# Altium PCB Breakout.PcbDoc (part 2 of 2)
Units mil, origin at the board's own origin, x right, y up, seen from the top; angles counter-clockwise.
Board outline 5500 x 6885 mil, 2 copper layers (Top Layer, Bottom Layer); 119 components, 162 nets, 1494 pads, 75 vias.
Unrouted connection lines stored in the file: 1.
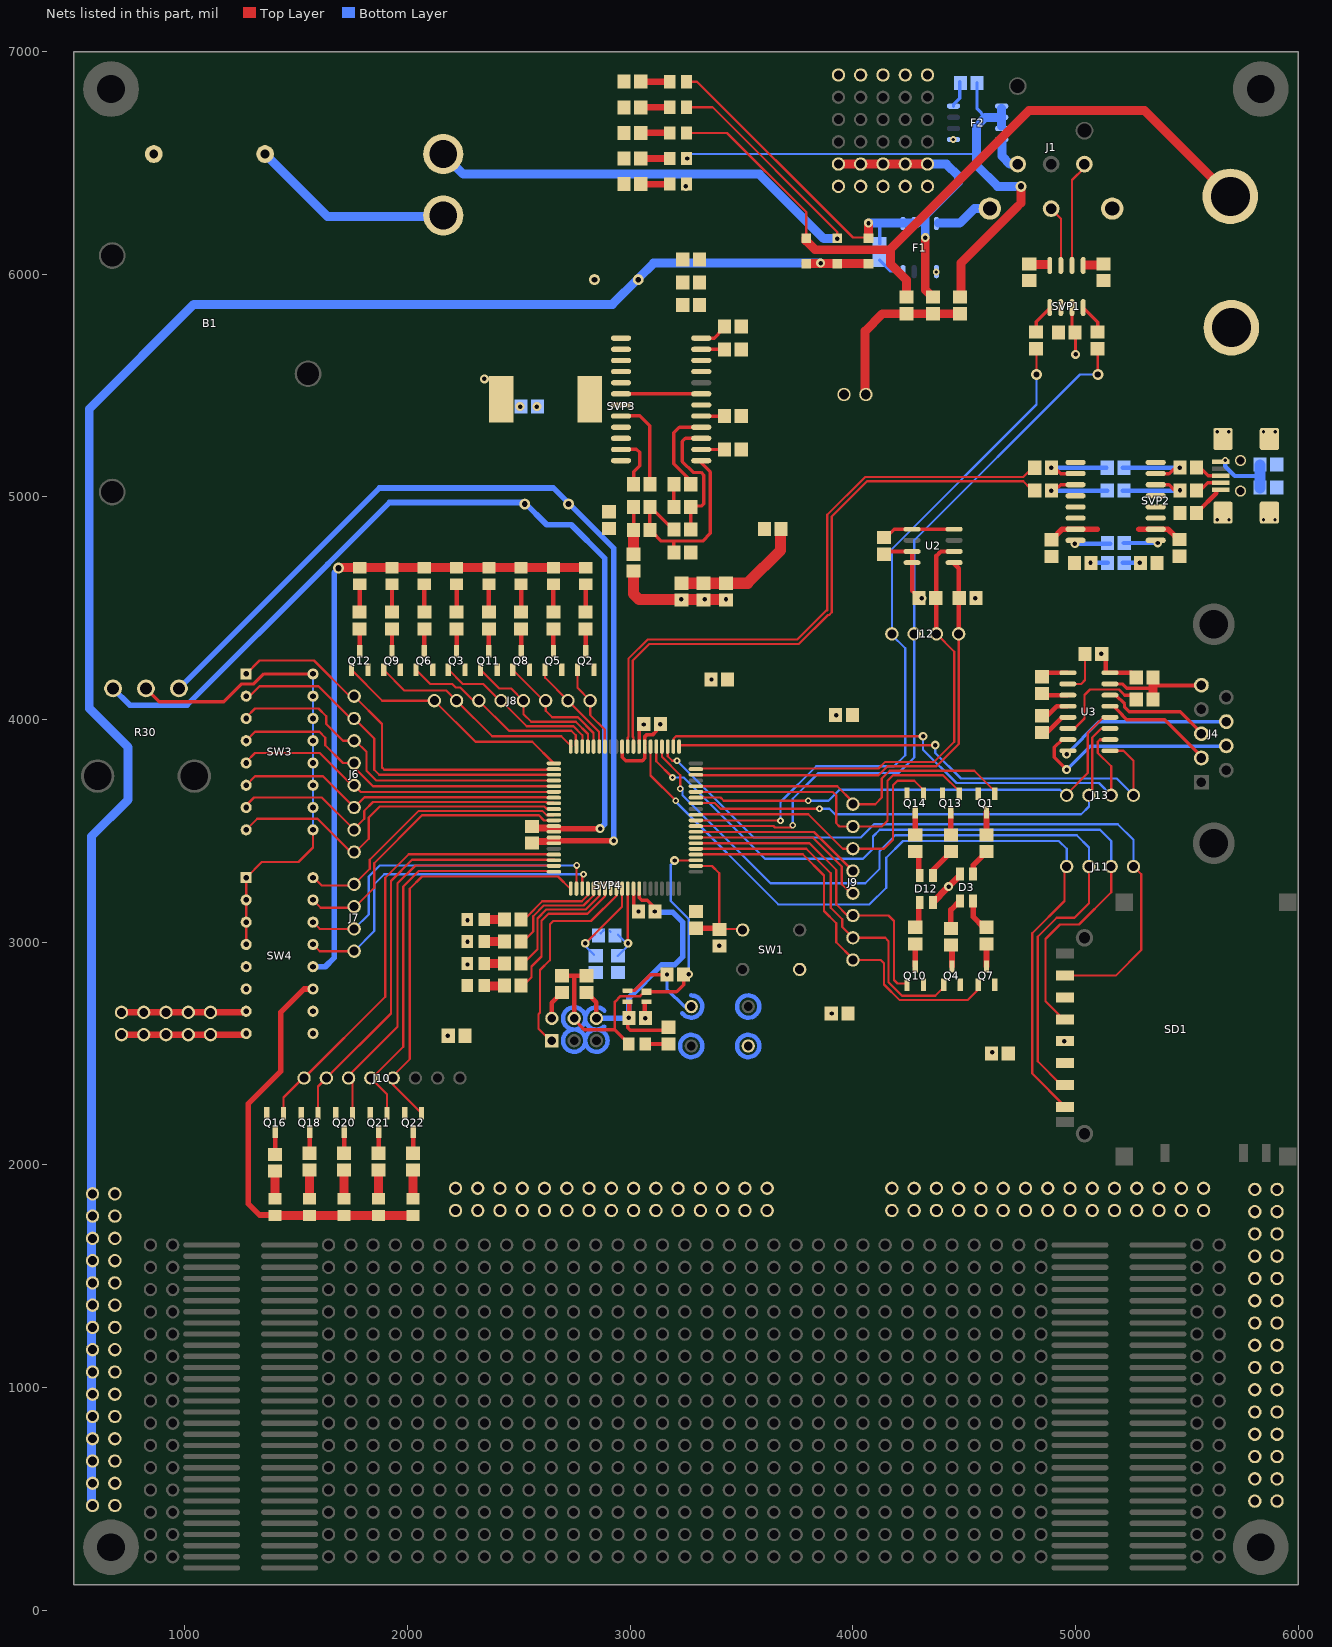
[diagram p2: the nets of this part, all layers, seen from the top]

## Via types
v1: diameter 40, hole 20, Top Layer to Bottom Layer, 50 vias
v2: diameter 30, hole 15, Top Layer to Bottom Layer, 21 vias
v3: diameter 50, hole 28, Top Layer to Bottom Layer, 4 vias

## Nets (pads, with @x,y where several pads share a name; then routed paths per layer and width w, separated by ;. In a path a pad name is that pad's centre, name@x,y a point inside that pad or via, vN(x,y) a via of type N, cw(c..) or ccw(c..) an arc to the next point about the centre after c; other vN are vias at no path point)
3: C3.2 U3.3 | length 115.5
  Top Layer w20: C3.2@4850,4110 U3.3@4965.51,4110
+3.3A: R30.3 SVP3.+3.3A SVP4.53 SVP4.+3.3A X1.2 | length 4346.5
  Top Layer w25: SVP4.+3.3A@2570,3510 v1(2865,3510)
  Top Layer w50: X1.2@3014.6,4749.6 SVP3.+3.3A@3014.6,4857
  Bottom Layer w25: R30.3@677,4140 752,4065 1010,4065 1642.5,4697.5 1642.5,4699.68 1917.82,4975 2525,4975 2625,4875 2735,4875 2885,4725 2885,3530 v1(2865,3510)
  other v1: 2505,5406 2345,5530
+3.3D: C1.2 C2.1 C6.1 C7.1 C8.1 C9.1 C10.1 C11.1 C13.1 C14.1 C15.1 D3.2 D12.2 D21.2 pad.120@5805,490 pad.120@5805,590 pad.120@5805,690 pad.120@5805,790 pad.120@5805,890 pad.120@5805,990 pad.120@5805,1090 pad.120@5805,1190 pad.120@5805,1290 pad.120@5805,1390 pad.120@5805,1490 pad.120@5805,1590 pad.120@5805,1690 pad.120@5805,1790 pad.120@5805,1890 pad.121@2215,1895 pad.121@2315,1895 pad.121@2415,1895 pad.121@2515,1895 pad.121@2615,1895 pad.121@2715,1895 pad.121@2815,1895 pad.121@2915,1895 pad.121@3015,1895 pad.121@3115,1895 pad.121@3215,1895 pad.121@3315,1895 pad.121@3415,1895 pad.121@3515,1895 pad.121@3615,1895 pad.121@4175,1895 pad.121@4275,1895 pad.121@4375,1895 pad.121@4475,1895 pad.121@4575,1895 pad.121@4675,1895 pad.121@4775,1895 pad.121@4875,1895 pad.121@4975,1895 pad.121@5075,1895 pad.121@5175,1895 pad.121@5275,1895 pad.121@5375,1895 pad.121@5475,1895 pad.121@5575,1895 pad.135@3935,6895 pad.136@4035,6895 pad.137@4135,6895 pad.138@4235,6895 pad.139@4335,6895 R5.1 R13.1 R14.1 SD1.4 SVP1.+3.3D SVP2.+3.3D SVP4.31 SVP4.+3.3D SW4.5 SW4.6 SW4.9 SW4.10 U2.7 U2.8 U3.16 X1.1 | length 1583.3
  Top Layer w15: SVP4.31@2964.8,3880 2964.8,3830.2 2980,3815 3055,3815 3065.57,3825.57 SVP4.+3.3D@3065.57,3878.9 ; v1(5000,5640) SVP1.+3.3D@5000,5745
  Top Layer w20: C11.1@4140,4745 4150,4755 U2.7@4265.51,4755 U2.8@4265.51,4705 4265.51,4579.49 4300,4545 R14.1@4315,4545 ; C2.1@5117.4,4295 5135,4277.4 5135,4210 C1.2@5252.6,4210
  Top Layer w30: D12.2@4359.06,3179 v1@4425.06,3245 ; v1@4435.03,3254.97 D3.2@4480.03,3299.97
  Top Layer w50: X1.1@3015,4667.6 3015,4565 3040,4540 v1(3430,4540)
  other v1: 4625,2505 4950,2555 2180,2580 2993,2661 3905,2680 3400,2985 3111,3138 4430,3250 3135,3980 3925,4020 3365,4180 5115,4295 3230,4540 3335,4540 4310,4545 4550,4545 4997,4790 3250,6395
+9V: D11.1 D17.2 SW2.1 | length 2862
  Top Layer w10: D17.2@3252.4,6750 3370,6750 3930,6190 D11.1@3930,6165
  Bottom Layer w40: SW2.1@2160,6540 2250,6450 3580,6450 3870,6160 v1(3930,6160)
+12P: D10.1 D16.2 F1.5 pad.135@3935,6495 pad.136@4035,6495 pad.137@4135,6495 pad.138@4235,6495 pad.139@4335,6495 R12.1 R31.2 | length 2699.1
  Top Layer w10: D16.2@3252.4,6865 3300,6865 4000,6165 D10.1@4070,6165
  Top Layer w40: pad.135@3935,6495 pad.136@4035,6495 pad.137@4135,6495 pad.138@4235,6495 pad.139@4335,6495 ; D10.1@4070,6165 v1(4070,6230) ; v1(4325,6165) 4325,5930 R31.2@4360,5895
  Bottom Layer w15: R12.1@4120,6137.4 4120,6220
  Bottom Layer w40: v1(4070,6230) 4275,6230 4290,6230 4475,6415 4475,6440 4420,6495 ; v1(4325,6165) F1.5@4325,6228.27 4325,6260 ; pad.139@4335,6495 4415,6495
+12P_UF: F1.8 J1.5 | length 261.9
  Bottom Layer w40: F1.8@4385,6230 4480,6230 4545,6295 J1.5@4615.2,6295 J1.5@4620,6295
+12S: D22.2 F2.5 R20.1 R29.2 | length 2743.5
  Top Layer w40: R29.2@4485,5895 4485,6050 4715,6280 ; 4740,6305 4715,6280 ; v3(4755,6395) 4755,6320 4715,6280
  Bottom Layer w10: v1(3255,6520) 3275,6540 4550,6540
  Bottom Layer w15: R20.1@4557.4,6860 4557.4,6742.6 4595,6705
  Bottom Layer w40: F2.5@4668.27,6666.73 F2.5@4668.27,6705 ; F2.5@4668.27,6745 F2.5@4668.27,6705 ; v3(4755,6395) 4650,6395 4555,6490 4555,6665 4595,6705 F2.5@4668.27,6705
+12S_UF: F2.8 J1.4 | length 149.5
  Bottom Layer w40: F2.8@4670,6595 4670,6530 4705,6495 J1.4@4740,6495
+BANANA: D13.1 D20.2 J2.1 R11.2 | length 3394.4
  Top Layer w10: D20.2@3252.4,6635 3435,6635 3790,6280 D13.1@3790,6162.09 D13.1@3790,6160
  Top Layer w40: D13.1@3790,6162.09 3790,6150 3830,6110 4169,6110 4169,6046 4240,5975 R11.2@4240,5900 ; 4169,6114 4790,6735 5310,6735 J2.1@5695,6350
+RADIO: J5.2 R11.1 R29.1 R31.1 | length 742.1
  Top Layer w40: J5.2@4055,5460 4055,5745 4132.6,5822.6 R11.1@4240,5822.6 R31.1@4360,5822.6 R29.1@4480,5822.6
A0: J8.1 Q2.1 SVP4.34 | length 394.4
  Top Layer w10: Q2.1@2762.6,4223.66 2762.6,4142.4 J8.1@2820,4085 2820,4020 2885,3955 SVP4.34@2885,3880
A1: J8.2 Q5.1 SVP4.35 | length 444.1
  Top Layer w10: Q5.1@2617.6,4223.66 2617.6,4187.4 J8.2@2720,4085 2860,3945 SVP4.35@2860,3880
A2: J8.3 Q8.1 SVP4.36 | length 552.5
  Top Layer w10: Q8.1@2472.6,4223.66 J8.3@2611.26,4085 ; J8.3@2620,4085 2620,4040 2650,4010 2765,4010 2835,3940 SVP4.36@2835,3885
A3: J8.4 Q11.1 SVP4.37 | length 687.1
  Top Layer w10: Q11.1@2327.6,4223.66 2411.26,4140 2465,4140 J8.4@2520,4085 2520,4025 2555,3990 2755,3990 2810,3935 SVP4.37@2810,3885
A4: J8.5 Q3.1 SVP4.38 | length 769
  Top Layer w10: Q3.1@2182.6,4223.66 2184.62,4223.66 2248.28,4160 2340,4160 J8.5@2415,4085 ; J8.5@2420,4085 2535,3970 2745,3970 2785,3930 SVP4.38@2785,3880
A5: J8.6 Q6.1 SVP4.39 | length 877
  Top Layer w10: Q6.1@2037.6,4223.66 2101.26,4160 2200,4160 2216,4144 2236,4144 2290,4090 J8.6@2315,4090 ; J8.6@2320,4085 2455,3950 2735,3950 2755,3930 SVP4.39@2755,3885
A6: J8.7 Q9.1 SVP4.40 | length 984.8
  Top Layer w10: Q9.1@1892.6,4223.66 1986.26,4130 2175,4130 J8.7@2220,4085 2380,3925 2690,3925 SVP4.40@2735,3880
A7: J8.8 Q12.1 SVP4.41 | length 1080.8
  Top Layer w10: Q12.1@1747.6,4223.66 1886.26,4085 J8.8@2120,4085 2305,3900 2560,3900 SVP4.41@2655,3805
AD0: J6.1 SVP4.42 SW3.1 | length 1725.2
  Top Layer w10: SW3.1@1275,4205 1335,4265 1580,4265 1740,4105 J6.1@1760,4105 1885,3980 1885,3785 1895,3775 2654.58,3775 SVP4.42@2657.1,3777.52
AD1: J6.2 SVP4.43 SW3.2 | length 1647.6
  Top Layer w10: SW3.2@1275,4105 1290,4105 1335,4150 1600,4150 1745,4005 J6.2@1760,4005 1850,3915 1850,3775 1873.07,3751.93 SVP4.43@2657.1,3751.93
AD2: J6.3 SVP4.44 SW3.3 | length 1598
  Top Layer w10: SW3.3@1275,4010 1315,4050 1600,4050 1635,4015 1635,3980 1710,3905 J6.3@1760,3905 ; J6.3@1765,3905 1815,3855 1815,3770 1858.66,3726.34 SVP4.44@2657.1,3726.34
AD3: J6.4 SVP4.45 SW3.4 | length 1525.6
  Top Layer w10: SW3.4@1275,3905 1315,3945 1604,3945 1630,3919 1630,3885 1710,3805 J6.4@1760,3805 ; J6.4@1750,3795 1844.25,3700.75 SVP4.45@2657.1,3700.75
AD4: J6.5 SVP4.46 SW3.5 | length 1471.1
  Top Layer w10: SW3.5@1275,3810 1315,3850 1605,3850 1750,3705 J6.5@1760,3705 1789.84,3675.16 SVP4.46@2657.1,3675.16
AD5: J6.6 SVP4.47 SW3.6 | length 1469.2
  Top Layer w10: SW3.6@1275,3705 1315,3745 1620,3745 J6.6@1760,3605 ; J6.6@1765,3610 1806,3651 2655.67,3651 SVP4.47@2657.1,3649.57
AD6: J6.7 SVP4.48 SW3.7 | length 1536.4
  Top Layer w10: SW3.7@1270,3610 1310,3650 1615,3650 J6.7@1760,3505 ; J6.7@1760,3510 1805,3555 1805,3590 1845,3630 2622.26,3630 2624.2,3628.07 2653.01,3628.07 SVP4.48@2657.1,3623.98
AD7: J6.8 SVP4.49 SW3.8 | length 1612.4
  Top Layer w10: SW3.8@1275,3505 1325,3555 1595,3555 1745,3405 J6.8@1760,3405 ; J6.8@1760,3400 1825,3465 1825,3560 1875,3610 2613.98,3610 2625.59,3598.39 SVP4.49@2657.1,3598.39
AD8: J7.1 SVP4.50 SW4.16 | length 1263.2
  Top Layer w10: SW4.16@1580,3290 1615,3255 1755,3255 J7.1@1760,3260 1830,3330 1830,3370 2050,3590 2605,3590 2625,3570 2654.31,3570 SVP4.50@2657.1,3572.8
AD9: J7.2 SVP4.51 SW4.15 | length 1342.4
  Top Layer w10: SW4.15@1575,3190 1610,3155 1760,3155 1850,3245 1850,3355 2065,3570 2590,3570 2612.8,3547.2 SVP4.51@2657.1,3547.2
AD10: J7.3 SVP4.62 SW4.14 | length 1510.5
  Top Layer w10: SW4.14@1575,3090 1605,3060 J7.3@1755,3060 ; SVP4.62@2758.48,3241.1 v2@2758.48,3341.52
  Bottom Layer w10: J7.3@1760,3060 1825,3125 1825,3295 1875,3345 v2(2760,3345)
AD11: J7.4 SVP4.63 SW4.13 | length 1577.3
  Top Layer w10: SW4.13@1575,2990 1605,2960 J7.4@1760,2960 ; SVP4.63@2784.07,3215.12 SVP4.63@2784.07,3241.1 v2@2784.07,3304.07
  Bottom Layer w10: J7.4@1760,2960 1850,3050 1850,3260 1895,3305 v2@2785,3305
  other v2: 2790,3305
ADSAMPLE: R30.2 SW3.9 SW3.10 SW3.11 SW3.12 SW3.13 SW3.14 SW3.15 SW3.16 SW4.1 SW4.2 SW4.3 SW4.4 | length 2262.5
  Top Layer w10: SW4.4@1275,2990 SW4.3@1275,3090 SW4.2@1275,3190 SW4.1@1275,3290 1345,3360 1510,3360 1575,3425 SW3.9@1575,3505
  Top Layer w15: R30.2@825,4140 885,4080 1175,4080 1255,4160 1310,4160 1355,4205 SW3.16@1575,4205
  Bottom Layer w10: SW3.9@1575,3500 SW3.16@1575,4200
AGND: B1.1 F1.1 F2.1 J1.1 J3.1 pad.135@3935,6395 pad.136@4035,6395 pad.137@4135,6395 pad.138@4235,6395 pad.139@4335,6395 R22.1 R23.1 R24.1 R27.1 R28.1 R30.1 SVP3.AGND SVP4.54 SVP4.AGND X2.2 | length 4105
  Top Layer w25: SVP4.AGND@2575,3455 v1(2925,3455)
  Top Layer w40: R28.1@2972.6,6405 R28.1@2975,6402.6
  Bottom Layer w25: R30.1@973,4140 1873,5040 2655,5040 2925,4770 v1(2925,3455)
  other v1: 2581,5406
  other v2: 4375,6010 4450,6605
CANH: J1.3 SVP1.CANH | length 303.7
  Top Layer w10: J1.3@4890,6295 4934,6251 SVP1.CANH@4934,6009.49
CANL: J1.2 SVP1.CANL | length 492.7
  Top Layer w10: SVP1.CANL@4984,6009.49 4984,6423 J1.2@5040,6479
CTS: J4.8 U3.8 | length 770.1
  Bottom Layer w15: v1(4960,3845) 5105,3990 J4.8@5670,3990
DGND: C1.1 C4.1 C6.2 C7.2 C8.2 C9.2 C10.2 C11.2 C12.2 C13.2 C14.2 C15.2 J4.5 J5.1 pad.120@2215,1795 pad.120@2315,1795 pad.120@2415,1795 pad.120@2515,1795 pad.120@2615,1795 pad.120@2715,1795 pad.120@2815,1795 pad.120@2915,1795 pad.120@3015,1795 pad.120@3115,1795 pad.120@3215,1795 pad.120@3315,1795 pad.120@3415,1795 pad.120@3515,1795 pad.120@3615,1795 pad.120@4175,1795 pad.120@4275,1795 pad.120@4375,1795 pad.120@4475,1795 pad.120@4575,1795 pad.120@4675,1795 pad.120@4775,1795 pad.120@4875,1795 pad.120@4975,1795 pad.120@5075,1795 pad.120@5175,1795 pad.120@5275,1795 pad.120@5375,1795 pad.120@5475,1795 pad.120@5575,1795 pad.121@685,470 pad.121@685,570 pad.121@685,670 pad.121@685,770 pad.121@685,870 pad.121@685,970 pad.121@685,1070 pad.121@685,1170 pad.121@685,1270 pad.121@685,1370 pad.121@685,1470 pad.121@685,1570 pad.121@685,1670 pad.121@685,1770 pad.121@685,1870 pad.121@5905,490 pad.121@5905,590 pad.121@5905,690 pad.121@5905,790 pad.121@5905,890 pad.121@5905,990 pad.121@5905,1090 pad.121@5905,1190 pad.121@5905,1290 pad.121@5905,1390 pad.121@5905,1490 pad.121@5905,1590 pad.121@5905,1690 pad.121@5905,1790 pad.121@5905,1890 Q1.2 Q2.2 Q3.2 Q4.2 Q5.2 Q6.2 Q7.2 Q8.2 Q9.2 Q10.2 Q11.2 Q12.2 Q13.2 Q14.2 Q16.2 Q18.2 Q20.2 Q21.2 Q22.2 SD1.3 SD1.6 SVP1.DGND SVP2.DGND SVP4.DGND SW1.2 U2.4 U2.5 U3.15 X2.1 | length 1450.3
  Top Layer w15: C11.2@4145,4815 4185,4855 U2.5@4265.51,4855 U2.4@4454.49,4855 U2.4@4455,4855 ; U3.15@5154.49,4160 5210,4160 5230,4140 5347.4,4140
  Top Layer w20: 5347.4,4140 5350,4140 ; 5351.89,4153.11 J4.5@5568.19,4153.11
  Top Layer w40: C4.1@5347.4,4092.6 5347.4,4140 C1.1@5347.4,4190
  Top Layer w50: C7.2@3225,4612.4 C7.2@3230,4612.4 C8.2@3330,4612.4 C9.2@3430,4612.4 3527.6,4612.4 3675,4759.8 X2.1@3675,4855
  other v1: 3068,2659 2269,2900 2269,3002 2269,3098 3037,3138 3060,3978 5067,4704
GPIO_0: J13.2 SVP4.22 U3.10 | length 2457.5
  Top Layer w10: SVP4.22@3195,3895 3195,3915 3205,3925 v1(4315,3925) ; 5110,3910 5100,3900 5100,3850 5160,3790 J13.2@5160,3660
  Top Layer w15: 5110,3910 U3.10@5154.49,3910
  Bottom Layer w10: v1(4315,3925) 4315,3865 4465,3715 5105,3715 J13.2@5160,3660
GPIO_1: J13.1 SVP4.21 U3.9 | length 2463.4
  Top Layer w10: SVP4.21@3220,3885 v1(4370,3885) ; U3.9@5154.49,3860 5215,3860 5260,3815 J13.1@5260,3665
  Top Layer w15: U3.9@5154.49,3860 U3.9@5190,3860
  Bottom Layer w10: v1(4370,3885) 4370,3850 4485,3735 5185,3735 J13.1@5260,3660
IRQ: C12.1 R5.2 SVP4.U_2 SW1.1 | length 583
  Top Layer w10: SVP4.U_2@3294.9,3342.48 3367.52,3342.48 3400,3310 3400,3055 3405,3060 SW1.1@3505,3060
  Top Layer w25: C12.1@3295,3062.6 R5.2@3397.4,3062.6
J0: J10.1 Q16.1 SVP4.57 | length 2049.6
  Top Layer w10: Q16.1@1442.4,2231.34 1442.4,2302.4 J10.1@1530,2390 ; J10.1@1535,2390 1900,2755 1900,3290 2005,3395 SVP4.57@2660,3395
J1: J10.2 Q18.1 SVP4.58 | length 1953.7
  Top Layer w10: Q18.1@1597.4,2231.34 1597.4,2352.4 J10.2@1635,2390 1925,2680 1925,3275 2020,3370 SVP4.58@2660,3370
J2: J10.3 Q20.1 SVP4.59 | length 1844.7
  Top Layer w10: J10.3@1725,2390 1955,2620 1955,3265 2035,3345 SVP4.59@2655,3345 ; Q20.1@1752.4,2231.34 J10.3@1752.4,2372.6
J3: J10.4 Q21.1 SVP4.60 | length 1816.8
  Top Layer w10: J10.4@1830,2380 1980,2530 1980,3250 2050,3320 2640,3320 SVP4.60@2645,3315 ; J10.4@1835,2390 1907.4,2317.6 Q21.1@1907.4,2231.34
J4: J10.5 Q22.1 SVP4.61 | length 1869.3
  Top Layer w10: J10.5@1920,2385 2010,2475 2010,3240 2065,3295 2675,3295 SVP4.61@2730,3240 ; J10.5@1935,2390 1935,2358.74 Q22.1@2062.4,2231.34
MISO: J11.1 SD1.7 SVP4.23 | length 3237.9
  Top Layer w10: SVP4.23@3167.93,3878.9 3167.93,3835.36 3188.28,3815 v2(3210,3815) ; SD1.7@4955,2850 5180,2850 5295,2965 5295,3305 J11.1@5260,3340
  Bottom Layer w10: v2(3210,3815) 3555,3470 4035,3470 4095,3530 5190,3530 5260,3460 J11.1@5260,3340
MOSI: J11.3 SD1.2 SVP4.24 | length 3696.1
  Top Layer w10: SVP4.24@3142.34,3878.9 3142.34,3832.66 3225,3750 v2(3225,3690) ; SD1.2@4935,2360 4830,2465 4830,3025 4915,3110 4995,3110 5060,3175 J11.3@5060,3340
  Bottom Layer w10: v2@3220,3695 3235,3695 3235,3660 3630,3265 4055,3265 4120,3330 4120,3410 4190,3480 5005,3480 5060,3425 J11.3@5060,3340
  Bottom Layer w15: J11.3@5060,3315 J11.3@5060,3340
NetB1_1: B1.2 SW2.2 | length 916
  Bottom Layer w40: B1.2@1360,6540 1640,6260 SW2.2@2160,6260
NetC2_2: C2.2 U3.2 | length 207.3
  Top Layer w10: U3.2@4960,4160 U3.2@4965.51,4160 5025,4160 5042.6,4177.6 C2.2@5042.6,4295
NetC3_1: C3.1 U3.1 | length 95.5
  Top Layer w20: C3.1@4870,4210 U3.1@4965.51,4210
NetC4_2: C4.2 U3.6 | length 414.4
  Top Layer w10: U3.6@4995,3960 5040,4005 5040,4110 5065,4135 5195,4135 5220,4110
  Top Layer w15: 5220,4110 C4.2@5265,4110
NetC5_1: C5.1 U3.4 | length 132.6
  Top Layer w10: C5.1@4850,4017.4 C5.1@4872.4,4017.4
  Top Layer w20: C5.1@4872.4,4017.4 4915,4060 U3.4@4965,4060
NetC5_2: C5.2 U3.5 | length 95.3
  Top Layer w20: C5.2@4872.6,3942.6 U3.5@4940,4010
NetD1_1: D1.1 R2.1 | length 122.6
  Top Layer w20: R2.1@2800,4482.4 D1.1@2800,4605
NetD2_1: D2.1 R3.1 | length 117.6
  Top Layer w20: R3.1@2220,4482.4 D2.1@2220,4600
NetD3_1: D3.1 R1.2 | length 123.9
  Top Layer w25: D3.1@4540,3306 4540,3345 R1.2@4600,3405
NetD3_3: D3.3 R6.2 | length 149.7
  Top Layer w25: D3.3@4540,3185 4540,3115 R6.2@4587.6,3067.4
  Top Layer w40: R6.2@4587.6,3067.4 R6.2@4600,3067.4
NetD3_4: D3.4 R4.2 | length 139.2
  Top Layer w25: R4.2@4440,3062.4 4440,3145 D3.4@4480,3185
NetD4_1: D4.1 R7.1 | length 122.6
  Top Layer w20: R7.1@2655,4482.4 D4.1@2655,4605
NetD5_1: D5.1 R8.1 | length 122.6
  Top Layer w20: R8.1@2075,4482.4 D5.1@2075,4605
NetD6_1: D6.1 R9.1 | length 122.6
  Top Layer w20: R9.1@2510,4482.4 D6.1@2510,4605
NetD7_1: D7.1 R10.1 | length 112.6
  Top Layer w20: R10.1@1930,4482.4 D7.1@1930,4595
NetD8_1: D8.1 R16.1 | length 112.6
  Top Layer w20: R16.1@2365,4482.4 D8.1@2365,4595
NetD9_1: D9.1 R17.1 | length 117.6
  Top Layer w20: R17.1@1785,4482.4 D9.1@1785,4600
NetD12_1: D12.1 R15.2 | length 94
  Top Layer w25: R15.2@4295,3085 D12.1@4295,3179
NetD12_3: D12.3 R19.2 | length 95.7
  Top Layer w25: D12.3@4295,3299.27 R19.2@4295,3395
NetD12_4: D12.4 R18.2 | length 139.3
  Top Layer w25: D12.4@4359.06,3299.27 4359.06,3324.06 R18.2@4440,3405
NetD15_1: D15.1 R21.1 | length 117.6
  Top Layer w40: D15.1@1405,1855 R21.1@1405,1972.6
NetD16_1: D16.1 R22.2 | length 122.6
  Top Layer w30: R22.2@3055,6865 D16.1@3177.6,6865
NetD17_1: D17.1 R23.2 | length 122.6
  Top Layer w30: R23.2@3055,6750 D17.1@3177.6,6750
NetD19_1: D19.1 R26.1 | length 117.6
  Top Layer w40: D19.1@1560,1860 R26.1@1560,1977.6
NetD20_1: D20.1 R24.2 | length 122.6
  Top Layer w30: R24.2@3055,6635 D20.1@3177.6,6635
NetD21_1: D21.1 R28.2 | length 117.6
  Top Layer w30: R28.2@3060,6405 D21.1@3177.6,6405
NetD22_1: D22.1 R27.2 | length 127.6
  Top Layer w30: R27.2@3050,6520 D22.1@3177.6,6520
NetD24_1: D24.1 R33.1 | length 117.6
  Top Layer w40: D24.1@1715,1860 R33.1@1715,1977.6
NetD25_1: D25.1 R34.1 | length 117.6
  Top Layer w40: D25.1@1870,1860 R34.1@1870,1977.6
NetD26_1: D26.1 R35.1 | length 117.6
  Top Layer w40: D26.1@2025,1860 R35.1@2025,1977.6
NetF1_4: F1.4 R12.2 | length 114.7
  Bottom Layer w15: R12.2@4120,6062.6 4167.6,6015 F1.4@4215,6015
NetF2_4: F2.4 R20.2 | length 121.7
  Bottom Layer w15: F2.4@4451.73,6755 4451.73,6761.73 4480,6790 R20.2@4480,6865
NetQ1_3: Q1.3 R1.1 | length 93.7
  Top Layer w25: R1.1@4600,3490 Q1.3@4600,3583.66
NetQ2_3: Q2.3 R2.2 | length 88.7
  Top Layer w20: Q2.3@2800,4306.34 R2.2@2800,4395
NetQ3_3: Q3.3 R3.2 | length 88.7
  Top Layer w20: Q3.3@2220,4306.34 R3.2@2220,4395
NetQ4_3: Q4.3 R4.1 | length 103.7
  Top Layer w25: Q4.3@4445,2891.34 R4.1@4445,2995
NetQ5_3: Q5.3 R7.2 | length 98.7
  Top Layer w20: Q5.3@2655,4306.34 R7.2@2655,4405
NetQ6_3: Q6.3 R8.2 | length 93.7
  Top Layer w20: Q6.3@2075,4306.34 R8.2@2075,4400
NetQ7_3: Q7.3 R6.1 | length 93.7
  Top Layer w25: Q7.3@4600,2891.34 R6.1@4600,2985
NetQ8_3: Q8.3 R9.2 | length 93.7
  Top Layer w20: Q8.3@2510,4306.34 R9.2@2510,4400
NetQ9_3: Q9.3 R10.2 | length 98.7
  Top Layer w20: Q9.3@1930,4306.34 R10.2@1930,4405
NetQ10_3: Q10.3 R15.1 | length 98.7
  Top Layer w25: Q10.3@4280,2891.34 R15.1@4280,2990
NetQ11_3: Q11.3 R16.2 | length 93.7
  Top Layer w20: Q11.3@2365,4306.34 R16.2@2365,4400
NetQ12_3: Q12.3 R17.2 | length 98.7
  Top Layer w20: Q12.3@1785,4306.34 1785,4355 R17.2@1785,4405
NetQ13_3: Q13.3 R18.1 | length 98.7
  Top Layer w25: R18.1@4440,3485 Q13.3@4440,3583.66
NetQ14_3: Q14.3 R19.1 | length 103.7
  Top Layer w25: R19.1@4280,3480 Q14.3@4280,3583.66
NetQ16_3: Q16.3 R21.2 | length 93.7
  Top Layer w20: R21.2@1405,2055 Q16.3@1405,2148.66
NetQ18_3: Q18.3 R26.2 | length 103.7
  Top Layer w20: R26.2@1560,2045 Q18.3@1560,2148.66
NetQ20_3: Q20.3 R33.2 | length 88.7
  Top Layer w20: R33.2@1715,2060 Q20.3@1715,2148.66
NetQ21_3: Q21.3 R34.2 | length 83.7
  Top Layer w20: R34.2@1870,2065 Q21.3@1870,2148.66
NetQ22_3: Q22.3 R35.2 | length 83.7
  Top Layer w20: R35.2@2025,2065 Q22.3@2025,2148.66
NewNet1: SVP2.1@5903.4,5043 SVP2.1@5903.4,5145 SVP2.6@5661.84,4929.65 SVP2.6@5661.84,5260.35 SVP2.6@5870.5,4929.65 SVP2.6@5870.5,5260.35 SVP2.10@5740.58,5026.1 SVP2.10@5740.58,5163.9
  other v2: 5689,4897 5844,4897 5636,4898 5896,4898 5636,5292 5688,5292 5844,5292 5897,5292
NewNet6: SVP4.1@2694,2849.4 SVP4.1@2804,2849.4 SVP4.1@2992.6,2543 SVP4.2@3073,2778 SVP4.2@3239.4,2855 SVP4.BDM_5 SVP4.U_3
  other v1: 3262,2856 3199,3367
NewNet8: SVP4.1@2648,2558 SVP4.69
NewNet9: SVP4.1@3164.6,2855 SVP4.1@3274,2711 SVP4.3@2988,2783
  other v1: 3165,2855
NewNet10: SVP4.1@2944,2939.4 SVP4.1@2990,2995 SVP4.2@2931.4,3030 SVP4.71
NewNet11: SVP4.1@2845,2939.4 SVP4.1@2856.6,3030 SVP4.2@2797.87,2995 SVP4.70
NewNet12: SVP1.NetR1_2
NewNet14: SVP1.NetC2_1
NewNet15: SVP1.NetR2_1
NewNet16: SVP1.NetR3_1
NewNet17: SVP2.1@5218.4,4704 SVP2.2@5291.6,4704 SVP2.2@5360.12,4855 SVP2.2@5467,4808.4 SVP2.2@5828.6,5043 SVP2.2@5828.6,5145 SVP2.5@5652,5157.99 SVP2.8
  other v1: 5288,4704
  other v2: 5673,5164
NewNet18: SVP2.1@5218.4,4794 SVP2.1@5360.12,4805 SVP2.1@5366.4,4704 SVP2.1@5467,4733.6 SVP2.2@5468.6,4927 SVP2.3@5360.12,4905 SVP2.4@5360.12,4955 SVP2.5@5360.12,5005
  other v1: 5369,4793
NewNet19: SVP2.1@5543.4,4927 SVP2.1@5652,5032.01
NewNet20: SVP2.1@5217.4,5131 SVP2.2@5468.6,5132 SVP2.7
  other v1: 5468,5132
NewNet21: SVP2.1@5543.4,5132 SVP2.3@5652,5095
NewNet24: SVP2.1@5217.4,5029 SVP2.2@5468.6,5029 SVP2.6@5360.12,5055
  other v1: 5469,5029
NewNet25: SVP2.1@5543.4,5029 SVP2.2@5652,5063.5
NewNet26: SVP2.2@4891.4,5029 SVP2.2@5142.6,5029 SVP2.11
  other v1: 4891,5027
NewNet27: SVP2.2@4891.4,5131 SVP2.2@5142.6,5131 SVP2.10@4999.88,5105
  other v1: 4891,5132
NewNet28: SVP3.1@3423.6,5213 SVP3.14
NewNet29: SVP3.1@3423.6,5363 SVP3.17
NewNet30: SVP3.1@3423.6,5663 SVP3.23
NewNet31: SVP3.1@3423.6,5766 SVP3.24
NewNet32: SVP3.1@3196.6,4750 SVP3.1@3196.6,4853 SVP3.2@3089.4,4852 SVP3.2@3089.4,4954 SVP3.13
NewNet33: SVP3.2@3271.4,4853 SVP3.2@3271.4,4955 SVP3.15
NewNet34: SVP3.1@3196.6,4955 SVP3.1@3196.6,5057
NewNet35: SVP3.2@3271.4,5057 SVP3.16
NewNet36: SVP3.2@2818.82,5438 SVP3.2@2958.88,5663 SVP3.2@3089.4,5057 SVP3.5 SVP3.8
NewNet37: SVP3.1@3014.6,5057 SVP3.11
NewNet38: SVP4.2@3067.4,2543 SVP4.2@3171,2543.6
NewNet39: SVP4.1@2509.4,3102 SVP4.64
NewNet40: SVP4.2@2343.4,3102 SVP4.2@2434.6,3102
NewNet41: SVP4.1@2509.4,3003 SVP4.65
NewNet42: SVP4.2@2343.4,3003 SVP4.2@2434.6,3003
NewNet43: SVP4.1@2509.4,2904 SVP4.66
NewNet44: SVP4.2@2343.4,2904 SVP4.2@2434.6,2904
NewNet45: SVP4.2@2343.4,2805 SVP4.2@2434.6,2805
NewNet46: SVP4.68
NewNet47: SVP4.1@2509.4,2805 SVP4.67
PORTA+: D1.2 D2.2 D4.2 D5.2 D6.2 D7.2 D8.2 D9.2 SW4.12 | length 2982.5
  Top Layer w20: D4.2@2652.4,4682.4 D4.2@2655,4682.4
  Top Layer w40: v3@1690,4682.4 D9.2@1785,4682.4 D7.2@1930,4682.4 D5.2@2075,4682.4 D2.2@2220,4682.4 D8.2@2365,4682.4 D6.2@2510,4682.4 D4.2@2655,4682.4 D1.2@2800,4682.4
  Bottom Layer w25: SW4.12@1575,2890 1630,2890 1670,2930 1670,4185 1670,4660 v3(1690,4680)
PORTJH+: D15.2 D19.2 D24.2 D25.2 D26.2 SW4.11 | length 1866.9
  Top Layer w25: 1435,1775 1335,1775 1285,1825 1285,2275 1430,2420 1430,2685 1535,2790 SW4.11@1575,2790
  Top Layer w40: 1435,1772.6 D19.2@1560,1772.6 D24.2@1715,1772.6 D25.2@1870,1772.6 D26.2@2022.6,1772.6
PWM0: J9.2 Q13.1 SVP4.15 | length 1546.5
  Top Layer w10: SVP4.15@3295,3675 3910,3675 3925,3660 3925,3535 3940,3520 J9.2@4000,3520 4129,3520 4155,3546 4155,3725 4180,3750 4405,3750 Q13.1@4475,3680
PWM1: J9.1 Q1.1 SVP4.16 | length 1533.6
  Top Layer w10: SVP4.16@3294.9,3700.75 3929.25,3700.75 4000,3630 J9.1@4000,3620 ; J9.1@4005,3620 J9.1@4000,3620 ; Q1.1@4635,3680 4545,3770 4165,3770 4130,3735 4130,3650 4100,3620 J9.1@4000,3620
PWM2: J9.8 Q7.1 SVP4.U_4 | length 1759.1
  Top Layer w10: SVP4.U_4@3295,3395 3775,3395 3870,3300 3870,3140 3925,3085 3925,3000 J9.8@4000,2925 ; J9.8@4000,2920 4125,2920 4140,2905 4140,2810 4210,2740 4515,2740 Q7.1@4565,2790
PWM3: J9.7 Q4.1 SVP4.5 | length 1629.6
  Top Layer w10: SVP4.5@3290,3420 3790,3420 3900,3310 3900,3155 3951.98,3103.02 3951.98,3068.02 J9.7@4000,3020 4145,3020 4160,3005 4160,2820 4220,2760 4370,2760 Q4.1@4410,2800
PWM4: J9.6 Q10.1 SVP4.6 | length 1447
  Top Layer w10: SVP4.6@3295,3445 3805,3445 3925,3325 3925,3170 3975,3120 J9.6@4000,3120 4160,3120 4185,3095 4185,2830 4200,2815 Q10.1@4235,2815
PWM5: J9.5 SVP4.7 | length 860.4
  Top Layer w10: SVP4.7@3290,3470 3820,3470 3950,3340 3950,3260 3990,3220 J9.5@4000,3220
PWM6: J9.4 SVP4.8 | length 777.5
  Top Layer w10: SVP4.8@3295,3495 3825,3495 J9.4@4000,3320
PWM7: J9.3 Q14.1 SVP4.11 | length 1377.7
  Top Layer w10: SVP4.11@3295,3575 3800,3575 3955,3420 J9.3@4000,3420 4140,3420 4180,3460 4180,3705 4200,3725 4275,3725 Q14.1@4320,3680
RTS: J4.7 U3.7 | length 951.3
  Top Layer w15: v1(4960,3775) 4905,3830 4905,3875 4940,3910 U3.7@4965.51,3910
  Bottom Layer w15: v1(4960,3775) 5065,3880 J4.7@5670,3880
RX: J13.4 SVP4.14 U3.12 | length 2147.1
  Top Layer w10: SVP4.14@3294.9,3649.57 3405.43,3649.57 3420,3635 v2(3800,3635) ; J13.4@4960,3665 5055,3760 5055,3940 5125,4010 U3.12@5154.49,4010
  Bottom Layer w10: v2(3800,3635) 3890,3635 3940,3685 4930,3685 J13.4@4960,3655
RX_IN: J4.2 U3.13 | length 497.9
  Top Layer w15: U3.13@5154.49,4060 5172.11,4060 5210.37,4021.73 5210.37,4019.63 5230,4000 5400,4000 J4.2@5560,3840
RXCAN: J12.3 SVP1.RXCAN SVP4.9 | length 3373.1
  Top Layer w10: SVP4.9@3294.9,3521.61 3643.39,3521.61 3650,3515 v2@3725,3515 ; v3(5100,5550) SVP1.RXCAN@5100,5640
  Bottom Layer w10: v2(3730,3525) 3730,3645 3845,3760 4205,3760 4275,3830 J12.3@4275,4385 4275,4805 5020,5550 v3(5100,5550)
S\S\: J11.4 SD1.1 SVP4.26 | length 3739.6
  Top Layer w10: SVP4.26@3091.16,3878.9 3091.16,3748.84 v2(3205,3635) ; SD1.1@4955,2260 4805,2410 4805,3040 4950,3185 4950,3330 J11.4@4960,3340
  Bottom Layer w10: v2@3205,3630 3665,3170 4075,3170 4150,3245 4150,3380 4225,3455 4925,3455 4960,3420 J11.4@4960,3340 J11.4@4960,3335
SCL2: J12.2 R14.2 SVP4.19 U2.2 | length 2176.1
  Top Layer w10: SVP4.19@3290,3780 4115,3780 4145,3810 4365,3810 4455,3900 4455,4305 J12.2@4375,4385
  Top Layer w20: J12.2@4375,4385 4375,4735 4395,4755 U2.2@4454.49,4755 U2.2@4460,4755
SDA2: J12.1 R13.2 SVP4.18 U2.1 | length 2063.3
  Top Layer w10: SVP4.18@3295,3750 4115,3750 4155,3790 4375,3790 4475,3890 J12.1@4475,4385
  Top Layer w20: U2.1@4450,4705 4475,4680 J12.1@4475,4385
SPSCK: J11.2 SD1.5 SVP4.25 | length 3407.3
  Top Layer w10: SVP4.25@3116.75,3878.9 3116.75,3813.25 v2(3190,3740) ; SD1.5@4945,2655 4865,2735 4865,3015 4930,3080 5015,3080 5160,3225 J11.2@5160,3340
  Bottom Layer w10: v2@3185,3740 v2(3190,3740) 3240,3740 3605,3375 4045,3375 4090,3420 4090,3475 4120,3505 5110,3505 5160,3455 J11.2@5160,3340
SW1: pad.135@715,2685 pad.136@815,2685 pad.137@915,2685 pad.138@1015,2685 pad.139@1115,2685 SW4.7 | length 560
  Top Layer w30: pad.135@715,2685 SW4.7@1275,2685
SW2: pad.135@715,2585 pad.136@815,2585 pad.137@915,2585 pad.138@1015,2585 pad.139@1115,2585 SW4.8 | length 550
  Top Layer w30: pad.135@715,2585 SW4.8@1265,2585
TX: J13.3 SVP4.13 U3.11 | length 2199.5
  Top Layer w10: SVP4.13@3300,3625 3380,3625 3405,3600 v2(3850,3600) ; J13.3@5060,3660 5075,3675 5075,3920 5115,3960 U3.11@5154.49,3960
  Bottom Layer w10: v2@3855,3605 3860,3600 3895,3600 3920,3575 5025,3575 5060,3610 J13.3@5060,3655
TX_OUT: J4.3 U3.14 | length 482.4
  Top Layer w15: U3.14@5154.49,4110 5180,4110 5220,4070 5220,4055.36 5240.36,4035 5470,4035 J4.3@5560,3945
TXCAN: J12.4 SVP1.TXCAN SVP4.10 | length 3193.4
  Top Layer w10: SVP4.10@3294.9,3547.2 v2@3672.2,3547.2 ; v3(4825,5550) 4825,5635
  Bottom Layer w10: v2(3675,3545) 3675,3630 3835,3790 4185,3790 4235,3840 4235,4320 J12.4@4175,4380 ; J12.4@4175,4385 4175,4765 4825,5415 v3(4825,5550)
USB_N: SVP2.USB_N SVP4.29 | length 2768.4
  Top Layer w10: SVP4.29@3014.39,3878.9 3014.39,3920 3011.59,3922.8 3011.59,4265 3086.59,4340 3758.28,4340 3888.28,4470 3893.28,4470 3905,4481.72 3905,4911.72 4063.28,5070 4765,5070 SVP2.USB_N@4795,5040
USB_P: SVP2.USB_P SVP4.30 | length 2822.8
  Top Layer w10: SVP4.30@2988.8,3878.9 2988.8,3920 2991.59,3922.8 2991.59,4273.28 3078.31,4360 3750,4360 3880,4490 3885,4490 3885,4920 4055,5090 4765,5090 SVP2.USB_P@4810,5135
VIN: D10.2 D11.2 D13.2 pad.120@585,470 pad.120@585,570 pad.120@585,670 pad.120@585,770 pad.120@585,870 pad.120@585,970 pad.120@585,1070 pad.120@585,1170 pad.120@585,1270 pad.120@585,1370 pad.120@585,1470 pad.120@585,1570 pad.120@585,1670 pad.120@585,1770 pad.120@585,1870 SVP3.+12P | length 8896.5
  Top Layer w40: D13.2@3790,6047.91 D11.2@3930,6047.91 D10.2@4067.91,6047.91
  Bottom Layer w40: pad.120@580,475 580,3475 745,3640 745,3875 570,4050 570,5395 1040,5865 2920,5865 SVP3.+12P@3036,5981 ; SVP3.+12P@3035,5980 SVP3.+12P@3036,5981 ; v1(3855,6050) 3105,6050 SVP3.+12P@3036,5981
pads on no net: B1.3 B1.4 B1.5 F1.2 F1.3 F2.2 F2.3 J1.6 J1.7 J1.8 J4.1 J4.4 J4.6 J4.9 J4.10 J4.11 J10.6 J10.7 J10.8 R30.4 R30.5 SD1.0 SD1.8 SD1.9 SD1.10 SD1.11 SD1.12 SD1.13 SD1.14 SD1.15 SD1.16 SVP2.4@5652,5126.5 SVP3.20 SVP4.2@2748,2558 SVP4.3@2848,2558 SVP4.3@3274,2533.83 SVP4.12 SVP4.17 SVP4.20 SVP4.32 SVP4.33 SVP4.56 SVP4.74 SVP4.75 SVP4.76 SVP4.77 SVP4.78 SVP4.79 SVP4.80 SVP4.SW_4 SVP4.U_1 SW1.3 SW1.4 U2.3 U2.6
copper on no net: | length 31965.5
  Top Layer w20: 845,240 895,190 1120,190 ; 845,340 895,290 1120,290 ; 845,440 895,390 1120,390 ; 845,540 895,490 1120,490 ; 845,640 895,590 1120,590 ; 845,740 895,690 1120,690 ; 845,840 895,790 1120,790 ; 845,940 895,890 1120,890 ; 845,1040 895,990 1120,990 ; 845,1140 895,1090 1120,1090 ; 845,1240 895,1190 1120,1190 ; 845,1340 895,1290 1120,1290 ; 845,1440 895,1390 1120,1390 ; 845,1540 895,1490 1120,1490 ; 845,1640 895,1590 1120,1590 ; 945,240 1120,240 ; 945,340 1120,340 ; 945,440 1120,440 ; 945,540 1120,540 ; 945,640 1120,640 ; 945,740 1120,740 ; 945,840 1120,840 ; 945,940 1120,940 ; 945,1040 1120,1040 ; 945,1140 1120,1140 ; 945,1240 1120,1240 ; 945,1340 1120,1340 ; 945,1440 1120,1440 ; 945,1540 1120,1540 ; 945,1640 1120,1640 ; 1470,190 1695,190 1745,240 ; 1470,240 1645,240 ; 1470,290 1695,290 1745,340 ; 1470,340 1645,340 ; 1470,390 1695,390 1745,440 ; 1470,440 1645,440 ; 1470,490 1695,490 1745,540 ; 1470,540 1645,540 ; 1470,590 1695,590 1745,640 ; 1470,640 1645,640 ; 1470,690 1695,690 1745,740 ; 1470,740 1645,740 ; 1470,790 1695,790 1745,840 ; 1470,840 1645,840 ; 1470,890 1695,890 1745,940 ; 1470,940 1645,940 ; 1470,990 1695,990 1745,1040 ; 1470,1040 1645,1040 ; 1470,1090 1695,1090 1745,1140 ; 1470,1140 1645,1140 ; 1470,1190 1695,1190 1745,1240 ; 1470,1240 1645,1240 ; 1470,1290 1695,1290 1745,1340 ; 1470,1340 1645,1340 ; 1470,1390 1695,1390 1745,1440 ; 1470,1440 1645,1440 ; 1470,1490 1695,1490 1745,1540 ; 1470,1540 1645,1540 ; 1470,1590 1695,1590 1745,1640 ; 1470,1640 1645,1640 ; 4745,240 4795,190 5020,190 ; 4745,340 4795,290 5020,290 ; 4745,440 4795,390 5020,390 ; 4745,540 4795,490 5020,490 ; 4745,640 4795,590 5020,590 ; 4745,740 4795,690 5020,690 ; 4745,840 4795,790 5020,790 ; 4745,940 4795,890 5020,890 ; 4745,1040 4795,990 5020,990 ; 4745,1140 4795,1090 5020,1090 ; 4745,1240 4795,1190 5020,1190 ; 4745,1340 4795,1290 5020,1290 ; 4745,1440 4795,1390 5020,1390 ; 4745,1540 4795,1490 5020,1490 ; 4745,1640 4795,1590 5020,1590 ; 4845,240 5020,240 ; 4845,340 5020,340 ; 4845,440 5020,440 ; 4845,540 5020,540 ; 4845,640 5020,640 ; 4845,740 5020,740 ; 4845,840 5020,840 ; 4845,940 5020,940 ; 4845,1040 5020,1040 ; 4845,1140 5020,1140 ; 4845,1240 5020,1240 ; 4845,1340 5020,1340 ; 4845,1440 5020,1440 ; 4845,1540 5020,1540 ; 4845,1640 5020,1640 ; 5370,190 5595,190 5645,240 ; 5370,240 5545,240 ; 5370,290 5595,290 5645,340 ; 5370,340 5545,340 ; 5370,390 5595,390 5645,440 ; 5370,440 5545,440 ; 5370,490 5595,490 5645,540 ; 5370,540 5545,540 ; 5370,590 5595,590 5645,640 ; 5370,640 5545,640 ; 5370,690 5595,690 5645,740 ; 5370,740 5545,740 ; 5370,790 5595,790 5645,840 ; 5370,840 5545,840 ; 5370,890 5595,890 5645,940 ; 5370,940 5545,940 ; 5370,990 5595,990 5645,1040 ; 5370,1040 5545,1040 ; 5370,1090 5595,1090 5645,1140 ; 5370,1140 5545,1140 ; 5370,1190 5595,1190 5645,1240 ; 5370,1240 5545,1240 ; 5370,1290 5595,1290 5645,1340 ; 5370,1340 5545,1340 ; 5370,1390 5595,1390 5645,1440 ; 5370,1440 5545,1440 ; 5370,1490 5595,1490 5645,1540 ; 5370,1540 5545,1540 ; 5370,1590 5595,1590 5645,1640 ; 5370,1640 5545,1640
  Top Layer w30: 3825,2155 4035,2155 4035,2245 3993.33,2245 4084.17,2381.25 4135,2305 4095,2305 4095,2215 4335,2215 4335,2305 4296.67,2305 4346.67,2380 4436.67,2245 4395,2245 4395,2155 4605,2155 4605,2245 4558.12,2245 4408.12,2485 4455,2485 4455,2575 4245,2575 4245,2485 4288.33,2485 4218.33,2380 4148.33,2485 4185,2485 4185,2575 3975,2575 3975,2485 4015.62,2485 3865.62,2245 3825,2245 3825,2155

## Polygon pours and split planes (outlines as drawn)
DGND on Top Layer "Top Layer-No Net" (solid, remove dead copper, pour order 1003): 505,5980 5995,5980 5995,1950 505,1950
AGND on Top Layer "Top Layer-No Net" (solid, remove dead copper, pour order 1002): 505,6995 5995,6995 5995,5400 5440.96,5400 5395.63,5445.57 5395.63,5881.03 5395.63,5886.1 5330.16,5951.92 5325.12,5956.98 505,5956.98
+3.3D on Bottom Layer "Top Layer-No Net" (solid, remove dead copper, pour order 1004): 505,6995 5995,6995 5995,1950 505,1950

## Other copper
Top Layer:
  rectangle net DGND: 3660,1775 4115,2020
  rectangle net DGND: 2160,1750 5620,1840
  rectangle net DGND: 5860,445 5955,1965
  rectangle net DGND: 640,425 730,2015
  pour cut-out: 3890,6975 3890,6450 4380,6450 4380,6975
  text "Rev 1.2" at 2800,2245 h60
  text "CBSB Breakout / Eval Board" at 2220,2125 h60
  text "Jonathan Nutzmann" at 2450,2010 h60
Bottom Layer:
  region net +3.3D: 4115,1995 3660,1995 3660,1750 4115,1750
  rectangle net +3.3D: 5760,445 5850,2065
  rectangle net +3.3D: 2165,1850 3695,2020
  rectangle net +3.3D: 4060,1850 5620,1970
  rectangle net VIN: 540,425 630,1920
  pour cut-out: 3890,6855 4380,6855 4380,6345 3890,6345

## Silkscreen, mask and mechanical layers (free items; w line width, h text height)
Top Overlay:
  lines w10: 3865,6315 2630,6315 2630,6955 3865,6955 ; 5955,1750 5955,440 5855,440 ; 5955,1945 5855,1945 ; 635,420 735,420 735,1925 635,1925 ; 635,420 535,420 535,1925 635,1925 ; 635,420 635,1925 ; 2160,1845 2160,1945 3665,1945 3665,1845 ; 2160,1845 2160,1745 3665,1745 3665,1845 ; 2160,1845 3665,1845 ; 4120,1845 4120,1945 5625,1945 5625,1845 ; 4120,1845 4120,1745 5625,1745 5625,1845 ; 4120,1845 5625,1845 ; 5855,440 5755,440 5755,1945 5855,1945 ; 5855,440 5855,1945 ; 3455,2815 3825,2815 3825,3170 3455,3170 3455,2815 ; 3880,6350 4390,6350 4390,6435 3880,6435 3880,6350 ; 3880,6450 3880,6535 4390,6535 4390,6450 3880,6450 ; 3880,6850 3880,6935 4390,6935 4390,6850 3880,6850
  text "+3.3D" at 4040,6945 h40
  text "+12V Primary" at 3315,6850 h40
  text "+9V Battery" at 3315,6735 h40
  text "+Banana Power" at 3315,6620 h40
  text "+12V Seconday" at 3315,6510 h40
  text "+12P" at 3705,6415 h40
  text "+3.3V" at 3315,6390 h40
  text "AGND" at 3705,6345 h40
  text "+12P" at 4380,5360 h40 r90
  text "+12S" at 4495,5360 h40 r90
  text "+Banana" at 4255,5355 h40 r90
  text "+12 Radio" at 3995,5285 h40 r90
  text "SDA2" at 4500,4160 h40 r90
  text "SCL2" at 4395,4155 h40 r90
  text "TXCAN" at 4195,4115 h40 r90
  text "RXCAN" at 4295,4115 h40 r90
  text "0" at 1845,4090 h40
  text "6" at 2200,4005 h40 r270
  text "5" at 2295,4005 h40 r270
  text "4" at 2395,4005 h40 r270
  text "3" at 2500,4005 h40 r270
  text "2" at 2595,4005 h40 r270
  text "0" at 2800,4005 h40 r270
  text "7" at 2095,4000 h40 r270
  text "1" at 2695,3995 h40 r270
  text "1" at 1855,3985 h40
  text "2" at 1845,3885 h40
  text "PORT A" at 2255,3865 h60
  text "3" at 1845,3790 h40
  text "ANALOG" at 1915,3695 h60 r270
  text "4" at 1845,3685 h40
  text "1" at 3895,3605 h40
  text "5" at 1845,3585 h40
  text "RX" at 4975,3515 h40 r90
  text "TX" at 5085,3515 h40 r90
  text "0" at 3890,3505 h40
  text "6" at 1845,3490 h40
  text "CTS" at 5285,3475 h40 r90
  text "RTS" at 5185,3470 h40 r90
  text "7" at 3890,3400 h40
  text "7" at 1850,3385 h40
  text "6" at 3890,3305 h40
  text "SPSCK" at 5385,3290 h40 r90
  text "MISO" at 5445,3290 h40 r90
  text "SS" at 4825,3285 h40 r90
  text "MOSI" at 4885,3285 h40 r90
  text "8" at 1850,3250 h40
  text "PWM" at 3825,3245 h60 r90
  text "5" at 3890,3205 h40
  text "IRQ" at 3460,3190 h60
  text "9" at 1850,3140 h40
  text "4" at 3890,3110 h40
  text "10" at 1845,3040 h40
  text "3" at 3890,3005 h40
  text "11" at 1850,2935 h40
  text "2" at 3890,2905 h40
  text "Port A Power" at 695,2875 h40
  text "Port J Power" at 695,2785 h40
  text "PORT J" at 1675,2550 h60
  text "Switched to +3.3D" at 545,2490 h40
  text "1" at 1655,2485 h40 r90
  text "0" at 1550,2475 h40 r90
  text "2" at 1755,2475 h40 r90
  text "3" at 1850,2475 h40 r90
  text "4" at 1955,2475 h40 r90
  text "VIN" at 600,1990 h40 r90
  text "DGND" at 705,1980 h40 r90
  text "+3.3D" at 3775,1865 h40
  text "DGND" at 5985,1775 h40 r90
  text "DGND" at 3805,1765 h40
  text "+3.3D" at 5730,1755 h40 r90
Top Solder:
  lines w30: 3825,2155 3825,2245 3865.62,2245 4015.62,2485 3975,2485 3975,2575 4185,2575 4185,2485 4148.33,2485 4218.33,2380 4288.33,2485 4245,2485 4245,2575 4455,2575 4455,2485 4408.12,2485 4558.12,2245 4605,2245 4605,2155 4395,2155 4395,2245 4436.67,2245 4346.67,2380 4296.67,2305 4335,2305 4335,2215 4095,2215 4095,2305 4135,2305 4084.17,2381.25 3993.33,2245 4035,2245 4035,2155 3825,2155
  text "Rev 1.2" at 2800,2245 h60
  text "CBSB Breakout / Eval Board" at 2220,2125 h60
  text "Jonathan Nutzmann" at 2450,2010 h60
Mechanical 15:
  the board outline again, w10

## Text inside footprints (layer, text, board x,y; h text height)
J4: Top Overlay "9" at 5858.09,4080.29 h59.06 r90; Top Overlay "5" at 5488.01,4134.82 h59.06 r90; Top Overlay "1" at 5488.01,3708.44 h59.06 r90; Top Overlay "6" at 5858.09,3753.13 h59.06 r90
SVP1: Top Overlay "RN1" at 4741,5963 h40 r90; Top Overlay "CN1" at 5228,5960 h40 r90; Top Overlay "RN2" at 4758,5652 h40 r90; Top Overlay "RN3" at 5200,5652 h40 r90; Top Overlay "CN2" at 4912,5635 h40; Top Overlay "UN1" at 4747,5880 h40
SVP2: Top Overlay "UU1" at 5068,5212 h40; Top Overlay "XU1" at 5616,4863 h40 r180; Top Overlay "CU3" at 5239,4653 h40 r90; Top Overlay "CU4" at 5568,4689 h40 r90; Top Overlay "CU2" at 5164,4653 h40 r90; Top Overlay "CU1" at 4833,4697 h40 r90; Top Overlay "RU4" at 5557,5293 h40 r180; Top Overlay "RU3" at 5558,5232 h40 r180; Top Overlay "RU2" at 4904,5234 h40 r180; Top Overlay "RU1" at 4890,4962 h40 r180; Bottom Overlay "RU9" at 5923,4941 h40; Bottom Overlay "CU7" at 5928,5200 h40; Bottom Overlay "RU8" at 5122,5229 h40 r180; Bottom Overlay "RU7" at 5123,4969 h40 r180; Bottom Overlay "RU6" at 5123,4888 h40 r180; Bottom Overlay "RU5" at 5126,4646 h40 r180
SVP3: Top Overlay "CP9" at 2842,4769 h40 r90; Top Overlay "CP1" at 3377,6050 h40; Top Overlay "CP2" at 3377,5947 h40; Top Overlay "CP3" at 3377,5848 h40; Top Overlay "CP4" at 3554,5343 h40; Top Overlay "CP5" at 3554,5194 h40; Top Overlay "CP6" at 3332,4937 h40; Top Overlay "CP7" at 3332,4834 h40; Top Overlay "CP8" at 2843,5067 h40; Top Overlay "CP10" at 2876,6103 h40; Top Overlay "CP11" at 2563,5048 h40; Top Overlay "LP1" at 2402,5711 h40; Top Overlay "UP1" at 3053,5600 h40; Top Overlay "RP1" at 3557,5748 h40; Top Overlay "RP2" at 3556,5642 h40; Top Overlay "RP3" at 3333,5038 h40; Top Overlay "RP4" at 3334,4729 h40; Top Overlay "RP5" at 2843,5006 h40; Top Overlay "RP6" at 2999,4753 h40; Bottom Overlay "CP12" at 2479,5345 h40 r180
SVP4: Top Overlay "SWM1" at 3602,2631 h35 r180; Top Overlay "UM1" at 3337,3252 h35 r180; Top Overlay "CM7" at 3164,4062 h35 r180; Top Overlay "CM6" at 2466,3549 h35 r270; Top Overlay "CM5" at 3139,3090 h35 r180; Top Overlay "CM2" at 2642,2772 h35 r180; Top Overlay "CM1" at 3216,2712 h35 r180; Top Overlay "RM8" at 2952,2798 h35 r180; Top Overlay "RM7" at 3213,2790 h35 r180; Top Overlay "RM6" at 3211,2484 h35 r180; Top Overlay "JM1" at 2569,2537 h35 r180; Top Overlay "RM5" at 2644,3120 h35 r180; Top Overlay "RM4" at 2646,3023 h35 r180; Top Overlay "RM3" at 2645,2921 h35 r180; Top Overlay "RM2" at 2643,2842 h35 r180; Top Overlay "DM5" at 3078,2483 h35 r180; Top Overlay "DM4" at 2184,3123 h35 r180; Top Overlay "DM3" at 2184,3022 h35 r180; Top Overlay "DM2" at 2184,2923 h35 r180; Top Overlay "DM1" at 2184,2824 h35 r180; Top Overlay "1" at 2677,2455 h40 r90; Bottom Overlay "CM3" at 2783,2803 h35 r180; Bottom Overlay "RM9" at 2856,3125 h35 r180; Bottom Overlay "CM4" at 2912,2804 h35 r180